# Altium PCB Capstone PCB.PcbDoc
Units mil, origin at the board's own origin, x right, y up, seen from the top; angles counter-clockwise.
Board outline 6000 x 4000 mil, 2 copper layers (Top Layer, Bottom Layer); 36 components, 39 nets, 149 pads, 0 vias.
Unrouted connection lines stored in the file: 49.
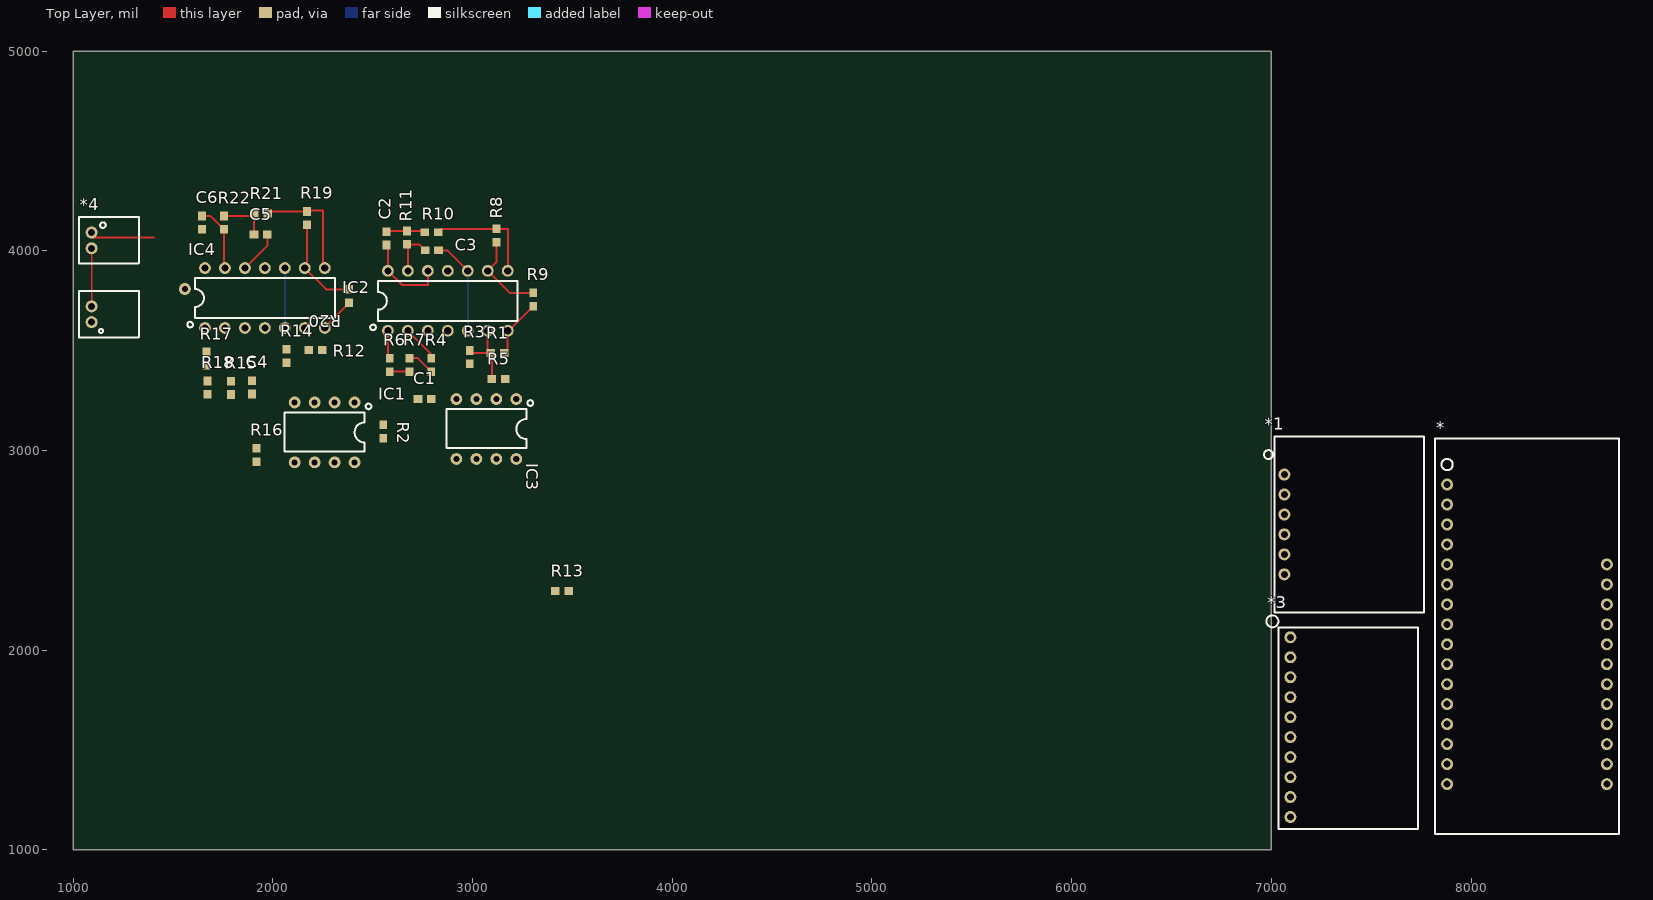
[diagram p0: Top Layer view]
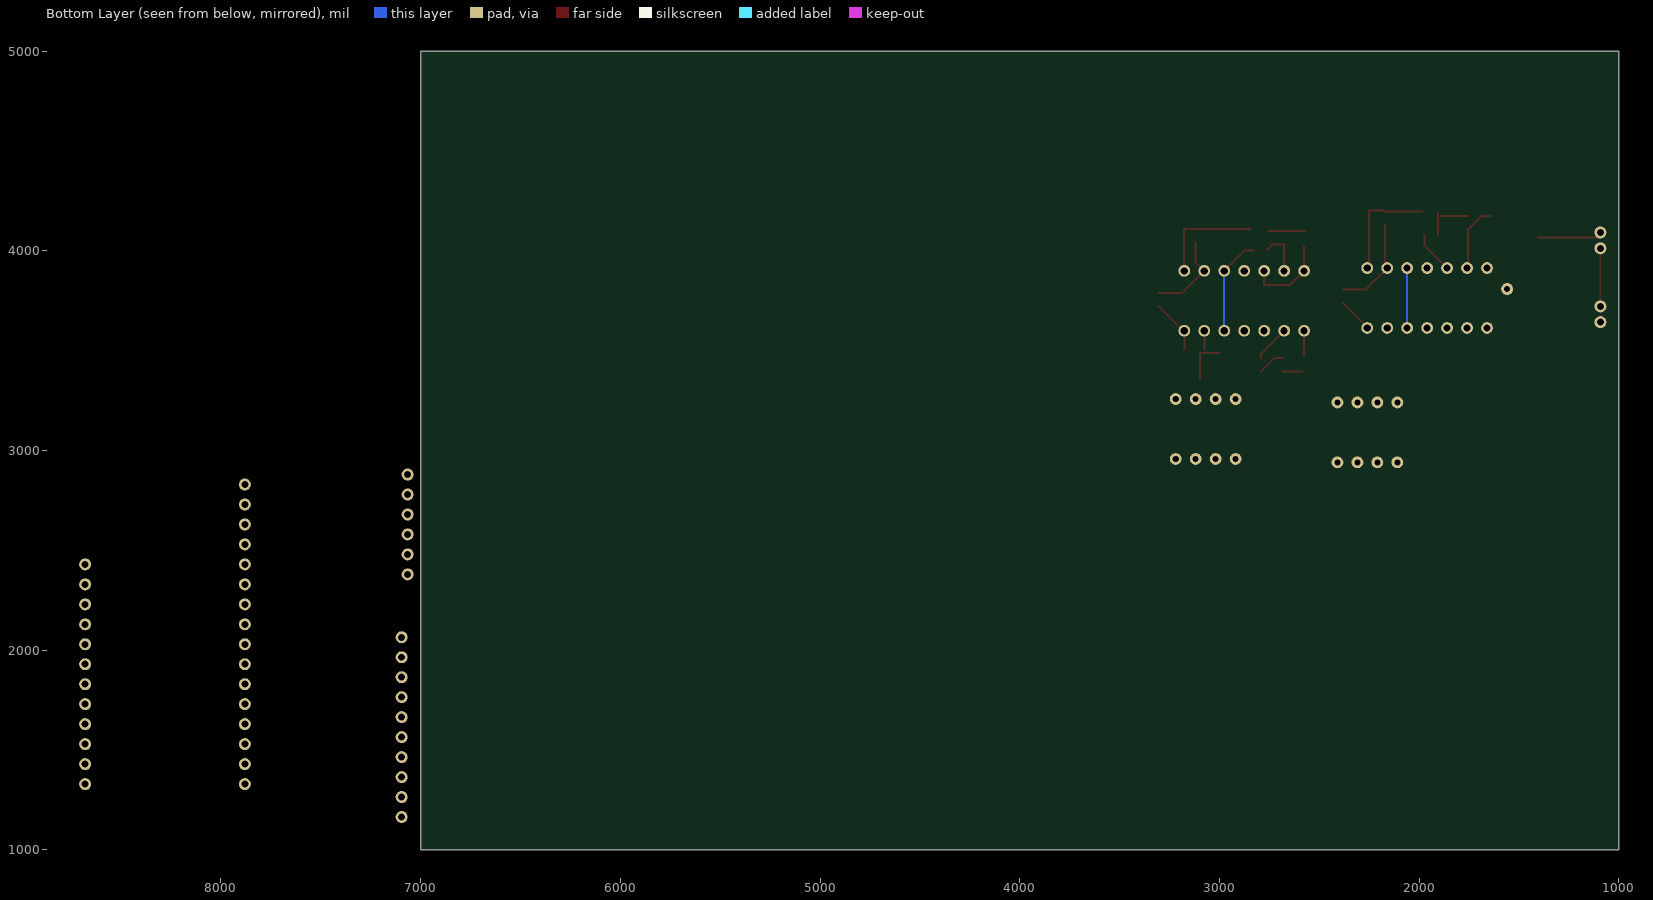
[diagram p1: Bottom Layer view, seen from below]

## Layer stack, top to bottom
Top Solder: solder mask 0.4, Solder Resist, Dk 3.5
Top Layer: signal copper 1.4
Dielectric 1: dielectric 12.6, FR-4, Dk 4.8
Bottom Layer: signal copper 1.4
Bottom Solder: solder mask 0.4, Solder Resist, Dk 3.5

## Board outline
1000,1000 7000,1000 7000,5000 1000,5000

## Design rules (kind name [scope] priority, off if disabled: settings)
Clearance [All] p1: gap=10
PolygonConnect [All] p1: connectstyle=Relief reliefconductorwidth=10 reliefentries=4 polygonreliefangle="90 Angle" airgapwidth=10
RoutingVias [All] p1: holewidth=28 width=50 viastyle="Through Hole" minholewidth=28 minwidth=50 maxholewidth=28 maxwidth=50
SolderMaskExpansion [All] p1: expansion=4
Width [All] p1: maxlimit=10 minlimit=10 preferedwidth=10
30 further rules are at their usual default settings.

## Components (designator, comment, footprint, x,y, rotation, side; value= is the part's Value field where it differs from the comment)
* "FEATHER_HUZZAH" Feather_Huzzah 7880,2830 r0 top
*1 "ADXL377" ADXL377_Acc 7065,2880 r0 top
*3 "ADC" ADC 7095,2065 r0 top
*4 "BATTERY_JST" BATTERY_JST 1059,4139 r270 top
C1 "2.2nF" CAP_0603 2760,3259 r0 top
C2 "Cap" CAP_0603 2569,4063 r90 top
C3 "Cap" CAP_0603 2796,4003 r180 top
C4 "2.2nF" CAP_0603 1896,3317 r90 top
C5 "Cap" CAP_0603 1939,4082 r180 top
C6 "Cap" CAP_0603 1645,4141 r90 top
IC1 "LT1920 OpAmp" LT1920 2409,3241 r270 top
IC2 "TCL2277 OpAmp" TLC2277 2576,3600 r90 top
IC3 "LT1920 OpAmp" LT1920 3219,3258 r270 top
IC4 "TCL2277 OpAmp" TLC2277 1660,3614 r90 top
R1 "1k" RES_0603 3125,3488 r0 top
R2 "499ohm" RES_0603 2553,3095 r270 top
R3 "1k" RES_0603 2986,3468 r90 top
R4 "71.5k" RES_0603 2793,3429 r90 top
R5 "2k" RES_0603 3130,3359 r180 top
R6 "1M" RES_0603 2585,3429 r90 top
R7 "4.99k/499ohm" RES_0603 2685,3429 r270 top
R8 "1k" RES_0603 3119,4077 r90 top
R9 "1k" RES_0603 3304,3756 r90 top
R10 "80.6k" RES_0603 2794,4093 r180 top
R11 "178k" RES_0603 2671,4066 r270 top
R12 "1k" RES_0603 2213,3504 r0 top
R13 "499ohm" RES_0603 3448,2297 r180 top
R14 "1k" RES_0603 2068,3474 r90 top
R15 "71.5k" RES_0603 1790,3314 r90 top
R16 "2k" RES_0603 1918,2978 r90 top
R17 "1M" RES_0603 1667,3460 r90 top
R18 "4.99k/499ohm" RES_0603 1673,3315 r90 top
R19 "1k" RES_0603 2170,4164 r90 top
R20 "1k" RES_0603 2382,3774 r90 top
R21 "80.6k" RES_0603 1940,4187 r180 top
R22 "178k" RES_0603 1755,4141 r270 top

## Footprints (in the part's own frame and the unit in brackets; to place one, negate y for a bottom-side part, rotate by r counter-clockwise, add the part's x,y. Pads: shape width x height; smd on the part's side, far side on the other; paste and mask are expansions set on the pad)
ADC [mil]
  round 60 hole 35: A0(0,-600) A1(0,-700) A2(0,-800) A3(0,-900) ADDR(0,-400) ALRT(0,-500) GND(0,-100) SCL(0,-200) SDA(0,-300) VDD(0,0)
  silkscreen extent -120,-960 640,110
ADXL377_Acc [mil]
  round 60 hole 35: 3.3V(0,-100) GND(0,0) ST(0,-500) X(0,-200) Y(0,-300) Z(0,-400)
  silkscreen extent -102,-690 700,190
BATTERY_JST [mil]
  round 60 hole 30: 4(330,500)
  round 60 hole 35: GND1(126,33) GND2(417,33) V+(47,33) V-(496,33)
  silkscreen extent -30,-30 572,270
CAP_0603 [mm] "Chip Capacitor, 2-Leads, Body 1.60x0.80mm, IPC Low Density"
  rect 1.1x1 smd: 1(-0.85,0) 2(0.85,0)
  body extent -0.87,-0.48 0.87,0.47, height 0.85
Feather_Huzzah [mil] "ESP8266 Feather Breakout Board"
  round 60 hole 35: 0(800,-1100) 2(800,-1300) 3V(0,-100) 12(800,-800) 13(800,-900) 14(800,-700) 15(800,-1000) 16(800,-1200) ADC(0,-400) BAT(800,-400) CHPD(0,-1500) EN(800,-500) GND(0,-300) M0(0,-1100) M1(0,-1200) NC1(0,-200) NC2(0,-500) NC3(0,-600) NC4(0,-700) NC5(0,-800) NC6(0,-900) RST(0,0) RX(0,-1300) SCK(0,-1000) SCL(800,-1400) SDA(800,-1500) TX(0,-1400) USB(800,-600)
  silkscreen extent -60,-1750 860,230
LT1920 [mm] "LT1920 OpAmp"
  round 1.5 hole 0.783: 1(0,0) 2(0,-2.54) 3(0,-5.08) 4(0,-7.62) 5(7.62,-7.62) 6(7.62,-5.08) 7(7.62,-2.54) 8(7.62,0)
  silkscreen extent 0.15,-8.89 6.22,2.14
RES_0603 [mm] "Chip Resistor, 2-Leads, Body 1.60x0.82mm, IPC Low Density"
  rect 1.1x1 smd: 1(-0.85,0) 2(0.85,0)
  body extent -0.85,-0.48 0.85,0.48, height 0.6
TLC2277 [mm] "TLC2277 OpAmp"
  round 1.5 hole 0.91: 1(0,0) 2(0,-2.54) 3(0,-5.08) 4(0,-7.62) 5(0,-10.16) 6(0,-12.7) 7(0,-15.24) 8(7.62,-15.24) 9(7.62,-12.7) 10(7.62,-10.16) 11(7.62,-7.62) 12(7.62,-5.08) 13(7.62,-2.54) 14(7.62,0)
  silkscreen extent 0.07,-16.51 6.35,2.25

## Part data
C1 C4: library part "CAP SEMI MLCC"
C2 C3 C5 C6: "Capacitor"
IC2 IC4: library part TCL2277
R1 R2 R3 R4 R5 R6 R7 R8 R9 R10 R11 R12 R13 R14 R15 R16 R17 R18 R19 R20 R21 R22: library part "RES SEMI (1.0%)", "1.0%"

## Nets (pads, with @x,y where several pads share a name; then routed paths per layer and width w, separated by ;. In a path a pad name is that pad's centre, name@x,y a point inside that pad or via, vN(x,y) a via of type N, cw(c..) or ccw(c..) an arc to the next point about the centre after c; other vN are vias at no path point)
3V: *1.3.3V *3.VDD *.3V
+VS: *4.V+ IC1.7 IC2.11 IC3.7 IC4.11 R5.1 R16.1 | length 312
  Top Layer w10: *4.V+@1093,4068 1405,4068
-VS: *4.V- IC1.4 IC2.4 IC3.4 IC4.4
GND: *1.GND *3.ADDR *3.GND *4.GND1 *4.GND2 *.GND C3.1 C6.1 IC2.5 IC2.10 IC4.5 IC4.10 R4.1 R7.1 R15.1 R18.1 | length 1215.9
  Top Layer w10: *4.GND2@1093,3698 *4.GND1@1093,3989 ; R7.1 2726.07,3462.46 R4.1 ; C3.1 2873,4003 IC2.10
  Bottom Layer w10: IC4.5 IC4.10 ; IC2.5 IC2.10
Net*1_X: *1.X *3.A2
Net*1_Y: *1.Y *3.A3
Net*1_Z: *1.Z *.ADC
Net*2_1V+: IC1.3
Net*2_1V-: IC1.2
Net*2_2V+: IC3.3
Net*2_2V-: IC3.2
Net*3_A0: *3.A0 C2.1 IC2.12 IC2.14 | length 422.9
  Top Layer w10: C2.1@2576,4022.54 IC2.14 2647,3829 2778,3829 IC2.12@2778,3898
Net*3_A1: *3.A1 C5.1 IC4.12 IC4.14 | length 214.6
  Top Layer w10: IC4.12 1972.46,4026.46 C5.1
Net*3_SCL: *3.SCL *.SCL
Net*3_SDA: *3.SDA *.SDA
NetC1_1: C1.1 IC1.6
NetC1_2: C1.2 IC2.2 R4.2 | length 186
  Top Layer w10: IC2.2 2793,3483 R4.2
NetC2_2: C2.2 R10.2 R11.1 | length 182.1
  Top Layer w10: C2.2@2572,4099.46 R11.1 R10.2@2754.07,4099.46
NetC3_2: C3.2 IC2.13 R11.2 | length 238.4
  Top Layer w10: IC2.13 2676,4027.54 R11.2 2733,4032.54 C3.2
NetC4_1: C4.1 IC3.6
NetC4_2: C4.2 IC4.2 R15.2
NetC5_2: C5.2 R21.2 R22.1 | length 243
  Top Layer w10: R22.1 R21.2@1894,4174.46 ; C5.2@1906.54,4083 R21.2
NetC6_2: C6.2 IC4.13 R22.2 | length 326.3
  Top Layer w10: C6.2 1688.07,4174.46 R22.2 IC4.13@1755,3919
NetIC1_1: IC1.1 R2.1
NetIC1_8: IC1.8 R2.2
NetIC2_1: IC2.1 R3.1 R6.2 | length 128.5
  Top Layer w10: R6.2@2576,3471.46 IC2.1
NetIC2_3: IC2.3 R6.1 R7.2 | length 100
  Top Layer w10: R6.1 R7.2
NetIC2_6: IC2.6 R1.1 R3.2 R5.2 | length 312.5
  Top Layer w10: R3.2@2999.46,3488 R1.1 ; R1.1@3076,3503.54 IC2.6 ; R5.2 R1.1@3096.54,3483
NetIC2_7: IC2.7 R1.2 R9.1 | length 273.2
  Top Layer w10: R1.2@3176,3505.54 IC2.7 3181.46,3600 R9.1
NetIC2_8: IC2.8 R8.2 R10.1 | length 541.5
  Top Layer w10: R10.1@2844.93,4110.46 R8.2 3177.54,4110.46 IC2.8@3177.54,3901.54
NetIC2_9: IC2.9 R8.1 R9.2 | length 435.1
  Top Layer w10: R8.1 3119,3943 IC2.9 3186.54,3789.46 R9.2
NetIC3_1: IC3.1 R13.1
NetIC3_8: IC3.8 R13.2
NetIC4_1: IC4.1 R14.1 R17.2
NetIC4_3: IC4.3 R17.1 R18.2
NetIC4_6: IC4.6 R12.1 R14.2 R16.2
NetIC4_7: IC4.7 R12.2 R20.1 | length 172.5
  Top Layer w10: IC4.7@2260,3618.54 R20.1
NetIC4_8: IC4.8 R19.2 R21.1 | length 547.9
  Top Layer w10: R21.1@1983.93,4197.46 R19.2 2174.54,4202 2251,4202 IC4.8@2251,3923
NetIC4_9: IC4.9 R19.1 R20.2 | length 472.7
  Top Layer w10: IC4.9 2266.54,3807.46 R20.2 ; IC4.9@2170,3924 R19.1
pads on no net: *1.ST *3.ALRT *4.4 *.0 *.2 *.12 *.13 *.14 *.15 *.16 *.BAT *.CHPD *.EN *.M0 *.M1 *.NC1 *.NC2 *.NC3 *.NC4 *.NC5 *.NC6 *.RST *.RX *.SCK *.TX *.USB IC1.5 IC3.5